# EAGLE board Nebenplatine (EAGLE 7.1.0)

Size 80 x 40 mm. Coordinates in mm from the lower left corner, seen from the top.
Outline: 0,0 80,0 80,40 0,40 0,0
Copper layers (1*16): Top 0.035mm / dielectric 1.5mm / Bottom 0.035mm
Design rules "default": minimum track width 10mil, minimum drill 24mil, track to track 8mil, track to pad 8mil, pad to pad 8mil, via to via 8mil, smd to smd 8mil, copper to edge 40mil, drill to drill 8mil, minimum pad ring 10mil, minimum via ring 8mil, stop-mask expansion 4mil, vias tented up to drill 0mil, thermal gap 10mil

## Footprints (pad centres in the part's own frame; a part is rotated, then mirrored left to right if it is on the bottom)
1X01-CLEANBIG = drill 1.016 pad 1.778: 1 0,0
SOIC127P600X175-8N = smd 1.981 x 0.559: 1 -2.362,1.905; 2 -2.362,0.635; 3 -2.362,-0.635; 4 -2.362,-1.905; 5 2.362,-1.905; 6 2.362,-0.635; 7 2.362,0.635; 8 2.362,1.905
C0402 = smd 0.7 x 0.9: 1 -0.65,0; 2 0.65,0
1X03-CLEANBIG = drill 1.016 pad 1.676: 1 -2.54,0; 2 0,0; 3 2.54,0
SOT23 = smd 0.8 x 0.9: 1 -0.95,-1; 2 0.95,-1; 3 0,1
R0402 = smd 0.7 x 0.9: 1 -0.65,0; 2 0.65,0
D16 = smd 2.184 x 0.559: 1 -2.362,4.445; 2 -2.362,3.175; 3 -2.362,1.905; 4 -2.362,0.635; 5 -2.362,-0.635; 6 -2.362,-1.905; 7 -2.362,-3.175; 8 -2.362,-4.445; 9 2.362,-4.445; 10 2.362,-3.175; 11 2.362,-1.905; 12 2.362,-0.635; 13 2.362,0.635; 14 2.362,1.905; 15 2.362,3.175; 16 2.362,4.445
SOT23-3 = smd 0.8 x 0.9: 1 -0.95,-1; 2 0.95,-1; 3 0,1.1
SOT95P280X145-5N = smd 1.27 x 0.559: 1 -1.295,0.94; 2 -1.295,0; 3 -1.295,-0.94; 4 1.295,-0.94; 5 1.295,0.94
SOP65P640X120-14N = smd 1.473 x 0.356: 1 -2.921,1.956; 2 -2.921,1.295; 3 -2.921,0.66; 4 -2.921,0; 5 -2.921,-0.66; 6 -2.921,-1.295; 7 -2.921,-1.956; 8 2.921,-1.956; 9 2.921,-1.295; 10 2.921,-0.66; 11 2.921,0; 12 2.921,0.66; 13 2.921,1.295; 14 2.921,1.956

## Placement (x,y rotation side)
3.3V  [1X01-CLEANBIG]  40.88,9.56 0 top
+5V  [1X01-CLEANBIG]  40.74,2.54 0 top
-5V  [1X01-CLEANBIG]  43.56,2.54 0 top
AD-WANDLER  MCP3201-CI/SN  [SOIC127P600X175-8N]  17.68,11.8 0 top
C1  0,1uF  [C0402]  6.59,30.63 90 top
C2  [C0402]  21.23,30.89 90 top
C3  [C0402]  33.58,30.68 90 top
C4  [C0402]  48.68,30.31 90 top
C5  [C0402]  63.97,29.83 90 top
DMS1+  [1X01-CLEANBIG]  9.24,37.41 0 top
DMS1-  [1X01-CLEANBIG]  12.1,37.34 0 top
DMS2+  [1X01-CLEANBIG]  23.73,37.71 90 top
DMS2-  [1X01-CLEANBIG]  26.66,37.74 90 top
DMS3+  [1X01-CLEANBIG]  35.91,37.81 90 top
DMS3-  [1X01-CLEANBIG]  39.25,37.81 90 top
DMS4+  [1X01-CLEANBIG]  50.65,37.7 90 top
DMS4-  [1X01-CLEANBIG]  53.45,37.4 90 top
DMS5+  [1X01-CLEANBIG]  66.4,37.4 90 top
DMS5-  [1X01-CLEANBIG]  69.41,37.42 90 top
GND  [1X01-CLEANBIG]  43.67,9.59 0 top
GPIO18  [1X01-CLEANBIG]  38.21,9.48 0 top
MISO  [1X01-CLEANBIG]  35.3,9.63 0 top
MUX_EN  [1X03-CLEANBIG]  35.64,2.49 0 top
Q1  BSS138  [SOT23]  52.98,6.68 270 top
Q2  BSS138  [SOT23]  53.01,3.4 270 top
Q3  BSS138  [SOT23]  53,10.26 270 top
Q4  BSS138  [SOT23]  15.96,4.36 90 top
R1F  100k  [R0402]  6.59,34.15 270 top
R2F  ???Ω  [R0402]  20.99,34.49 90 top
R3F  ???Ω  [R0402]  33.59,34.5 90 top
R4F  ???Ω  [R0402]  48.77,33.94 90 top
R5F  ???Ω  [R0402]  63.72,33.59 90 top
R11  350Ω  [R0402]  9.4,34.13 270 top
R12  350Ω  [R0402]  9.44,30.6 90 top
R13  350Ω  [R0402]  12.18,30.54 270 top
R21  350Ω  [R0402]  23.76,34.43 270 top
R22  350Ω  [R0402]  23.81,30.9 90 top
R23  350Ω  [R0402]  25.89,30.89 270 top
R31  350Ω  [R0402]  35.76,34.55 270 top
R32  350Ω  [R0402]  36.05,30.71 90 top
R33  350Ω  [R0402]  38.32,30.69 270 top
R41  350Ω  [R0402]  50.68,33.94 270 top
R42  350Ω  [R0402]  50.76,29.97 90 top
R43  350Ω  [R0402]  53.32,29.94 270 top
R51  350Ω  [R0402]  66.54,33.57 270 top
R52  350Ω  [R0402]  66.58,29.73 90 top
R53  350Ω  [R0402]  69.09,29.6 270 top
RL1  10kΩ  [R0402]  12.33,4.3 0 top
RL2  10kΩ  [R0402]  20.92,4.37 90 top
RL3  10kΩ  [R0402]  50.54,6.65 90 top
RL4  10kΩ  [R0402]  56.15,5.81 0 top
RL5  10kΩ  [R0402]  50.56,3.43 90 top
RL6  10kΩ  [R0402]  56.23,2.83 0 top
RL7  10kΩ  [R0402]  50.42,9.99 90 top
RL8  10kΩ  [R0402]  56.44,10.2 0 top
RL9  220Ω  [R0402]  12.14,10.15 270 top
RV1  1kΩ  [R0402]  64.75,26.84 0 top
RV2  10kΩ  [R0402]  61.18,33.53 270 top
RV3  10kΩ  [R0402]  61.22,29.95 270 top
RV4  100kΩ  [R0402]  67.56,26.06 270 top
RW1  1kΩ  [R0402]  49.73,27.07 0 top
RW2  10kΩ  [R0402]  46.3,33.88 270 top
RW3  10kΩ  [R0402]  46.22,30.04 270 top
RW4  100kΩ  [R0402]  52.51,26.36 270 top
RX1  1kΩ  [R0402]  34.67,28.02 0 top
RX2  10kΩ  [R0402]  31.55,34.61 270 top
RX3  10kΩ  [R0402]  31.66,30.61 270 top
RX4  100kΩ  [R0402]  37.37,27.17 270 top
RY1  10kΩ  [R0402]  18.64,34.47 270 top
RY2  1kΩ  [R0402]  22.19,27.9 0 top
RY3  10kΩ  [R0402]  18.68,30.84 270 top
RY4  100kΩ  [R0402]  24.72,27.18 270 top
RZ1  10kΩ  [R0402]  4.07,34.14 90 top
RZ2  1kΩ  [R0402]  7.57,27.96 180 top
RZ3  10kΩ  [R0402]  4.09,30.52 270 top
RZ4  100kΩ  [R0402]  10.96,27.33 270 top
SCLK  [1X01-CLEANBIG]  32.75,9.49 0 top
U1  SN74HC4851-Q1_D_16  [D16]  65.68,10.59 270 top
U2  LM4040  [SOT23-3]  11.28,14.53 90 top
U3  OPA354AQDBVRQ1  [SOT95P280X145-5N]  8.6,23.92 270 top
U4  OPA4354AIPWR  [SOP65P640X120-14N]  43.81,19.23 0 top

## Library data of the parts
3.3V +5V -5V DMS1+ DMS1- DMS2+ DMS2- DMS3+ DMS3- DMS4+ DMS4- DMS5+ DMS5- GND GPIO18 MISO MUX_EN SCLK = adafruit
AD-WANDLER = MCP3201-CI_SN; AVAILABILITY: Unavailable; DESCRIPTION: Single Channel SPI Serial Interface 2.7 V 12-Bit A/D Converter SMT - SOIC-8; MF: Microchip; MP: MCP3201-CI/SN; PACKAGE: SOIC-8 Microchip; PRICE: None
C1-C5 = resistor; SPICEPREFIX: C
Q1-Q4 = bss138_10; MF: Fairchild; MPN: BSS138; OC_FARNELL: 9845330; OC_NEWARK: 67R2009
R1F R2F R3F R4F R5F R11-R13 R21-R23 R31-R33 R41-R43 R51-R53 RL1-RL9 RV1-RV4 RW1-RW4 RX1-RX4 RY1-RY4 RZ1-RZ4 = resistor; SPICEPREFIX: R
U1 = Analog_MUX; MANUFACTURER_PART_NUMBER: SN74HC4851Q1_D_16; VENDOR: Texas Instruments
U2 = LM4040; AVAILABILITY: Unavailable; DESCRIPTION: lm4040 improved precision micropower shunt voltage reference with multiple reverse breakdown voltages; MF: Amphenol; MP: LM4040; PACKAGE: None; PRICE: None
U3 = OPA354AQDBVRQ1; AVAILABILITY: Unavailable; DESCRIPTION: Automotive 250MHz, Rail-to-Rail I/O, CMOS Single Operational Amplifier 5-SOT-23 -40 to 125; MF: Texas Instruments; MP: OPA354AQDBVRQ1; PACKAGE: SOT-23 Texas Instruments; PRICE: None
U4 = OPA4354AIPWR; AVAILABILITY: Unavailable; DESCRIPTION: 250MHz, Rail-to-Rail I/O, CMOS Quad Operational Amplifier 14-TSSOP -40 to 125; MF: Texas Instruments; MP: OPA4354AIPWR; PACKAGE: TSSOP-14 Texas Instruments; PRICE: None

## Nets
+5V: +5V.1 AD-WANDLER.8 R11.2 R12.2 R21.2 R22.2 R31.2 R32.2 R41.2 R42.2 R51.2 R52.2 RL1.1 RL4.2 RL6.2 RL8.2 RL9.2 U1.16 U3.5 U4.4
-5V: -5V.1 U3.2 U4.11
GND: AD-WANDLER.3 AD-WANDLER.4 DMS1-.1 DMS2-.1 DMS3-.1 DMS4-.1 DMS5-.1 GND.1 R13.1 R23.1 R33.1 R43.1 R53.1 RV3.2 RW3.2 RX3.2 RY3.2 RZ3.2 U1.8 U2.2
N$1: AD-WANDLER.7 SCLK.1
N$2: AD-WANDLER.6 MISO.1
N$4: 3.3V.1 Q1.1 Q2.1 Q3.1 Q4.1 RL2.1 RL3.2 RL5.2 RL7.2
N$5: AD-WANDLER.1 RL9.1 U2.1
N$6: C1.2 R1F.2 RZ1.2
N$7: DMS2+.1 R2F.2 R21.1
N$8: RY1.2 RY3.1 U4.3
N$11: MUX_EN.3 Q2.2 RL5.1
N$12: Q1.3 RL4.1 U1.9
N$14: GPIO18.1 Q4.2 RL2.2
N$15: AD-WANDLER.2 U1.3
N$20: MUX_EN.1 Q3.2 RL7.1
N$21: Q2.3 RL6.1 U1.10
N$22: MUX_EN.2 Q1.2 RL3.1
N$23: Q3.3 RL8.1 U1.11
N$27: AD-WANDLER.5 Q4.3 RL1.2
N$30: C1.1 R12.1 R13.2 RZ2.2
N$31: RX2.2 RX3.1 U4.5
N$32: RY2.2 RY4.1 U4.2
N$33: C3.1 R32.1 R33.2 RX1.1
N$34: C4.1 R42.1 R43.2 RW1.1
N$40: DMS3+.1 R3F.2 R31.1
N$41: DMS1+.1 R1F.1 R11.1
N$43: RZ1.1 RZ3.1 U3.3
N$44: RZ2.1 RZ4.1 U3.4
N$45: C5.2 R5F.1 RV2.1
N$48: DMS4+.1 R4F.2 R41.1
N$49: C4.2 R4F.1 RW2.1
N$51: DMS5+.1 R5F.2 R51.1
N$52: C2.2 R2F.1 RY1.1
N$53: C2.1 R22.1 R23.2 RY2.1
N$54: C3.2 R3F.1 RX2.1
N$55: RX1.2 RX4.1 U4.6
N$56: C5.1 R52.1 R53.2 RV1.1
N$57: RW2.2 RW3.1 U4.9
N$58: RV2.2 RV3.1 U4.12
N$59: RW1.2 RW4.1 U4.10
N$60: RV1.2 RV4.1 U4.13
N$61: RW4.2 U1.1 U4.8
N$63: RY4.2 U1.15 U4.1
N$64: RX4.2 U1.12 U4.7
N$65: RZ4.2 U1.14 U3.1
N$67: RV4.2 U1.5 U4.14

## Tracks (layer width: path | path; a pad name or v marks a point on that pad's centre or on a via)
+5V  (19 unrouted)
-5V  (2 unrouted)
GND  (19 unrouted)
N$1  (1 unrouted)
N$2  (1 unrouted)
N$4  (8 unrouted)
N$5  (2 unrouted)
N$6  (2 unrouted)
N$7  (2 unrouted)
N$8  (2 unrouted)
N$11  (2 unrouted)
N$12  (2 unrouted)
N$14  (2 unrouted)
N$15  (1 unrouted)
N$20  (2 unrouted)
N$21  (2 unrouted)
N$22  (2 unrouted)
N$23  (2 unrouted)
N$27  (2 unrouted)
N$30  (3 unrouted)
N$31  (2 unrouted)
N$32  (2 unrouted)
N$33  (3 unrouted)
N$34  (3 unrouted)
N$40  (2 unrouted)
N$41  (2 unrouted)
N$43  (2 unrouted)
N$44  (2 unrouted)
N$45  (2 unrouted)
N$48  (2 unrouted)
N$49  (2 unrouted)
N$51  (2 unrouted)
N$52  (2 unrouted)
N$53  (3 unrouted)
N$54  (2 unrouted)
N$55  (2 unrouted)
N$56  (3 unrouted)
N$57  (2 unrouted)
N$58  (2 unrouted)
N$59  (2 unrouted)
N$60  (2 unrouted)
N$61  (2 unrouted)
N$63  (2 unrouted)
N$64  (2 unrouted)
N$65  (2 unrouted)
N$67  (2 unrouted)